# Altium PCB Carrier.PcbDoc (part 1 of 2)
Units mm, origin at the board's own origin, x right, y up, seen from the top; angles counter-clockwise.
Board outline 203.08 x 138.21 mm, 2 copper layers (Top Layer, Bottom Layer), stack 1.58 mm thick; 120 components, 113 nets, 492 pads, 85 vias.
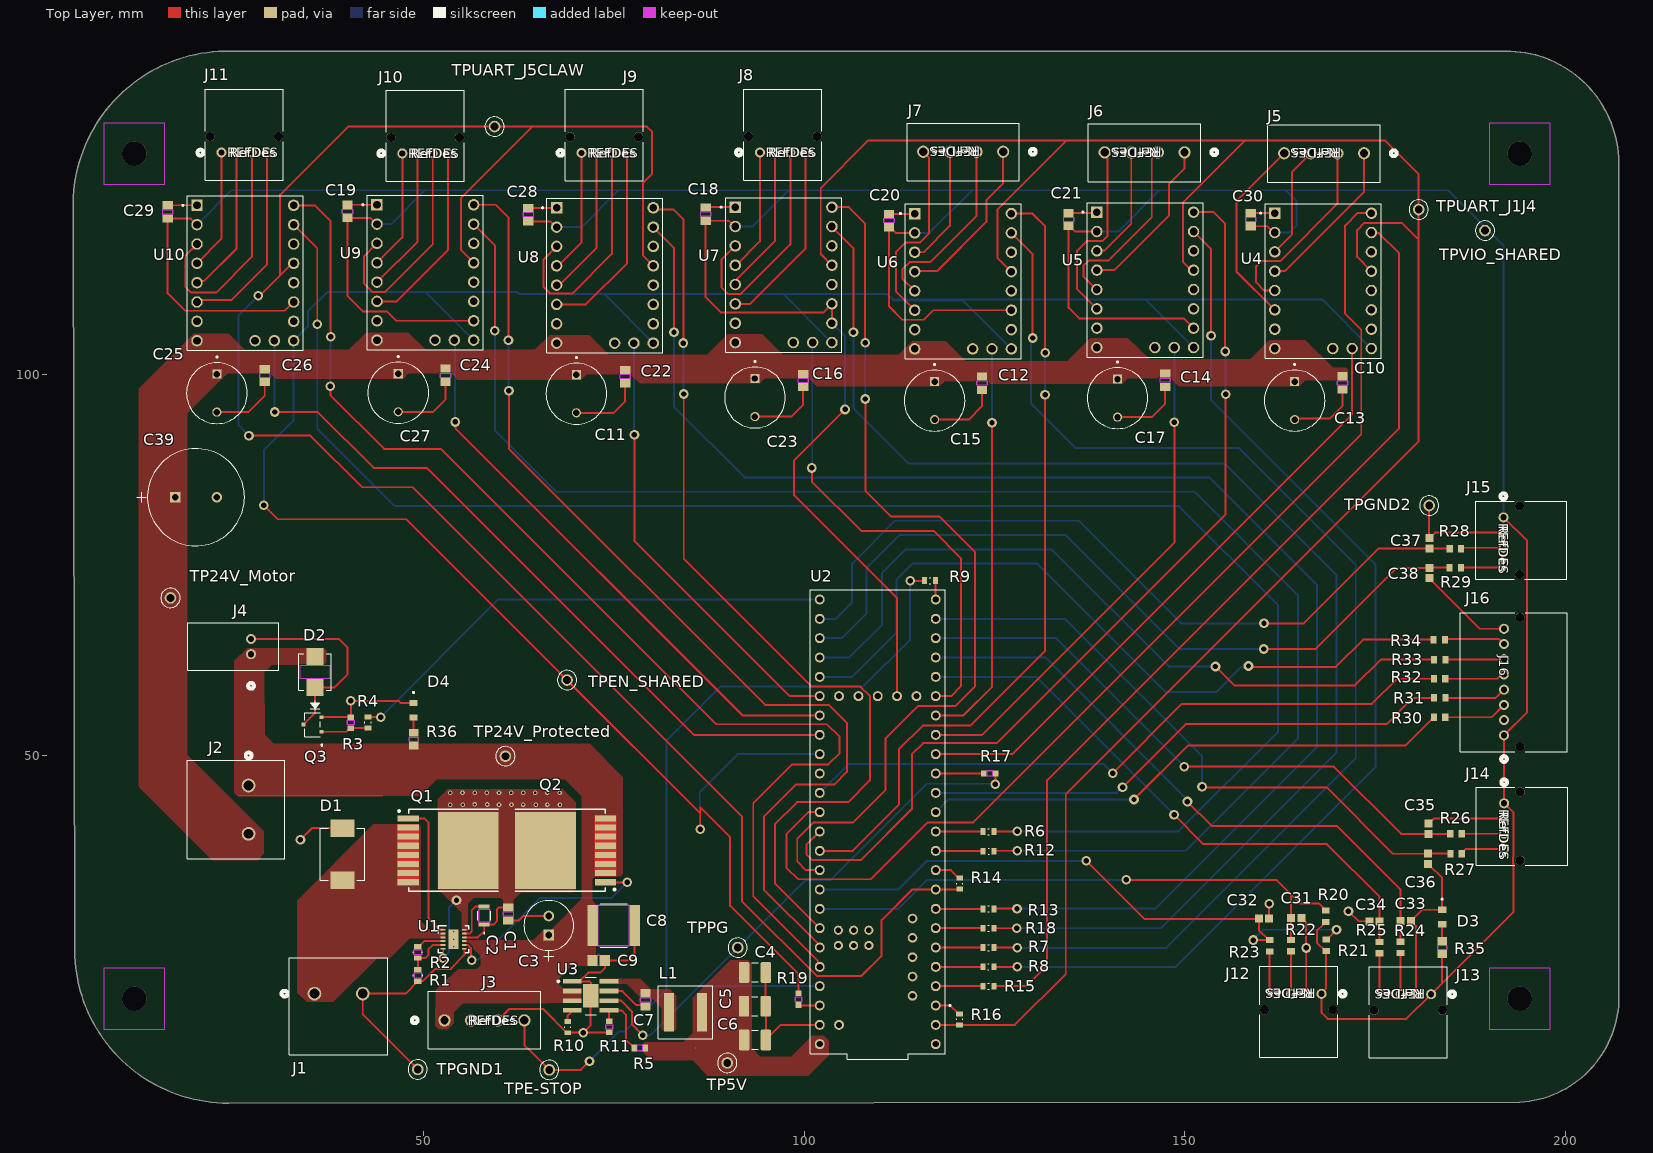
[diagram p0: Top Layer view]
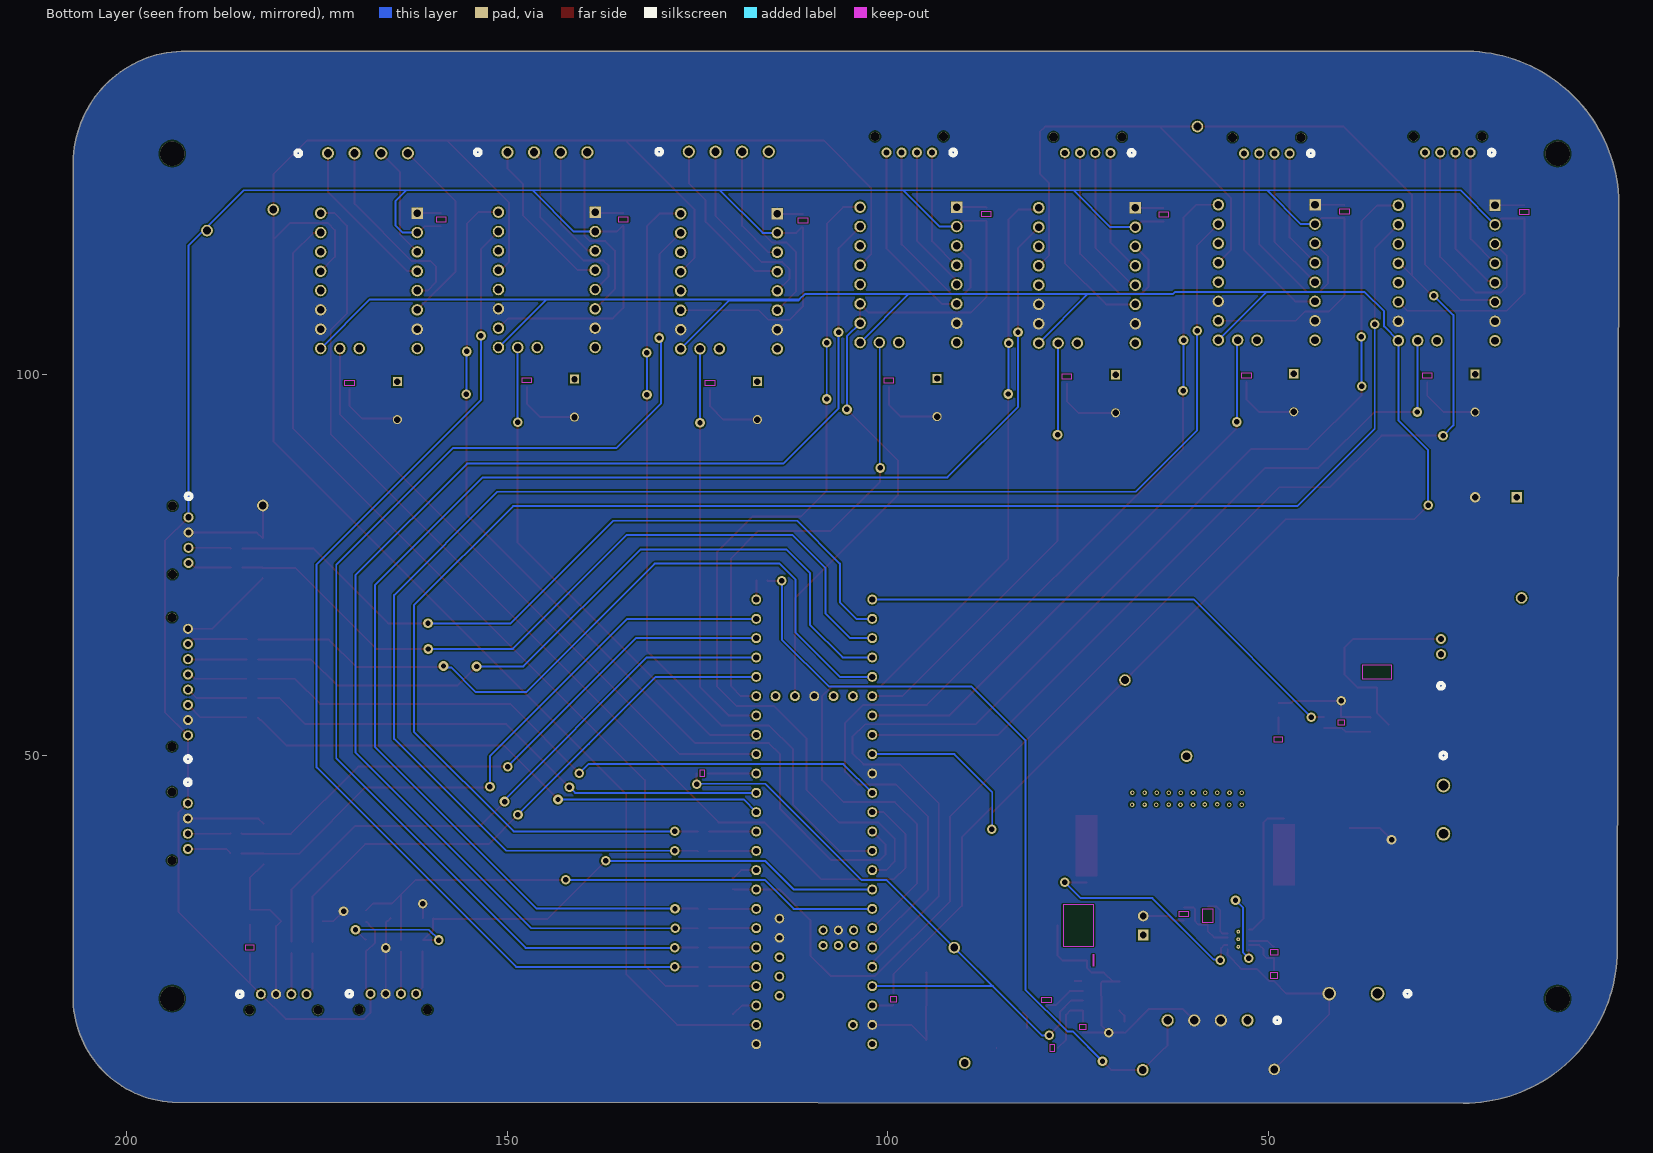
[diagram p1: Bottom Layer view, seen from below]
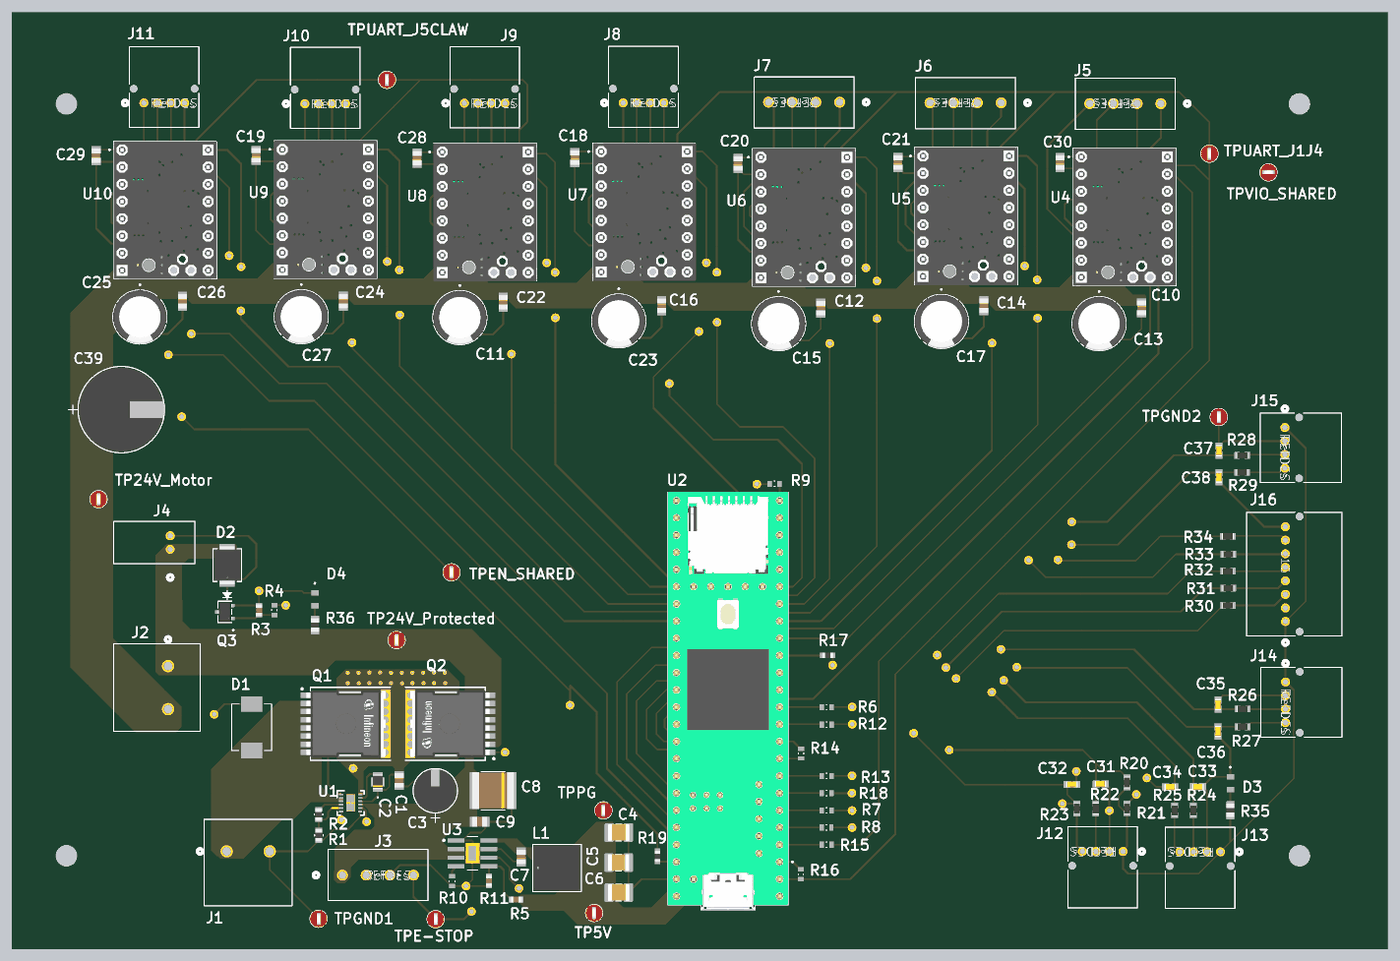
[diagram p3: 3D render of the assembled board from above, using the file's embedded part models]

## Layer stack, top to bottom
Top Solder: solder mask 0.0102, Solder Resist, Dk 3.5
Top Layer: signal copper 0.0356
Dielectric 1: dielectric 1.5086, FR-4, Dk 4.8
Bottom Layer: signal copper 0.0356
Bottom Solder: solder mask 0.0102, Solder Resist, Dk 3.5

## Board outline
4.161,24.355 ccw(c24.314,24.417) 24.377,4.263 24.345,4.276 193.968,4.374 193.999,4.373 ccw(c193.194,18.174) 206.995,18.979 206.995,127.863 ccw(c192.256,127.728) 192.12,142.467 24.593,142.469 ccw(c24.222,122.187) 3.94,122.558

## Design rules (kind name [scope] priority, off if disabled: settings)
Clearance [All] p1: gap=0.2 ignorepadtopadclearanceinfootprint=TRUE
PolygonConnect PolygonConnect_24V_Protected [InNet('24V_Protected') vs InNet('24V_Protected')] p1: connectstyle=Direct reliefconductorwidth=0.254 reliefentries=4 polygonreliefangle="90 Angle" airgapwidth=0.254
PolygonConnect PolygonConnect_24V_MOTOR [InNet('24V_Motor') vs InNet('24V_Motor')] p2: connectstyle=Direct reliefconductorwidth=0.254 reliefentries=4 polygonreliefangle="90 Angle" airgapwidth=0.254
PolygonConnect PolygonConnect_C4_1 [InNet('NetC4_1') vs InNet('NetC4_1')] p3: connectstyle=Direct reliefconductorwidth=0.254 reliefentries=4 polygonreliefangle="90 Angle" airgapwidth=0.254
PolygonConnect PolygonConnect_C7_2 [InNet('NetC7_2') vs InNet('NetC7_2')] p4: connectstyle=Direct reliefconductorwidth=0.254 reliefentries=4 polygonreliefangle="90 Angle" airgapwidth=0.254
PolygonConnect PolygonConnect_C3_1 [InNet('NetC3_1') vs InNet('NetC3_1')] p5: connectstyle=Direct reliefconductorwidth=0.254 reliefentries=4 polygonreliefangle="90 Angle" airgapwidth=0.254
PolygonConnect "PolygonConnect C1_1" [InNet('NetC1_1') vs InNet('NetC1_1')] p6: connectstyle=Direct reliefconductorwidth=0.254 reliefentries=4 polygonreliefangle="90 Angle" airgapwidth=0.254
PolygonConnect "Polygon Connect +24V" [InNet('+24V') vs InNet('+24V')] p7: connectstyle=Direct reliefconductorwidth=0.254 reliefentries=4 polygonreliefangle="90 Angle" airgapwidth=0.254
RoutingVias [All] p1: holewidth=0.711 width=1.27 viastyle="Through Hole" minholewidth=0.711 minwidth=1.27 maxholewidth=0.711 maxwidth=1.27
SolderMaskExpansion [All] p1: expansion=0 istentingtop=FALSE
SupplyNets "Schematic Supply Nets_1" [InNet('GND')] p1: voltage=0.000
SupplyNets "Schematic Supply Nets" [InNet('+24V')] p2: voltage=0.000
Width [All] p1: maxlimit=0.254 minlimit=0.254 preferedwidth=0.254
30 further rules are at their usual default settings.

## Classes and differential pairs
component class Spare_Pins: C31 C32 C33 C34 C35 C36 C37 C38 J12 J14 J15 J16 R20 R21 R22 R23 R24 R25 R26 R27 R28 R29 R30 R31 R32 R33 R34
component class MC: C3 C4 C5 C6 C7 C8 C9 D2 D3 J4 L1 Q3 R3 R4 R5 R6 R7 R8 R9 R10 R11 R12 R13 R14 R15 R16 R17 R18 R19 R35 TP5V TPEN_SHARED TPGND1 TPGND2 TPPG TPVIO_SHARED U2 U3
component class Entry_Protection: C1 C2 C39 D1 D4 J1 J2 J3 Q1 Q2 R1 R2 R36 TP24V_Motor TP24V_Protected TPE-STOP U1
component class Drivers: C10 C11 C12 C13 C14 C15 C16 C17 C18 C19 C20 C21 C22 C23 C24 C25 C26 C27 C28 C29 C30 J5 J6 J7 J8 J9 J10 J11 TPUART_J1J4 TPUART_J5CLAW U4 U5 U6 U7 U8 U9 U10

## Components (designator, comment, footprint, x,y, rotation, side; value= is the part's Value field where it differs from the comment)
C1 "CL21B104KCCWPNC" CAP_CL_21_SAM 61.116,29.114 r270 top
C2 "" CAP_2012_TDK 57.957,28.914 r90 top
C3 "EEUFR1J470" CAP_EEUFC_63X112_PAN 66.444,26.359 r90 top
C4 "CL32B226KAJNNNE" CAPC3225X270N 93.527,21.431 r0 top
C5 "CL32B226KAJNNNE" CAPC3225X270N 93.502,17 r0 top
C6 "CL32B226KAJNNNE" CAPC3225X270N 93.527,12.569 r0 top
C7 "CL21B104KCCWPNC" CAP_CL_21_SAM 79.132,17.823 r90 top
C8 "22201C106MAT2A" CAP_22201C106MAT2A_KYO 74.968,27.61 r180 top
C9 "C0805C154K1RECTU" CAPC220145_140N_KEM 73,23.02 r180 top
C10 "CL21B104KCCWPNC" CAP_CL_21_SAM 170.694,98.889 r270 top
C11 "EEUFR1H101B" CAPPRD500W60D800H1150 70.071,97.457 r270 top value=100µF
C12 "CL21B104KCCWPNC" CAP_CL_21_SAM 123.344,98.85 r270 top
C13 "EEUFR1H101B" CAPPRD500W60D800H1150 164.426,96.562 r270 top value=100µF
C14 "CL21B104KCCWPNC" CAP_CL_21_SAM 147.41,99.235 r270 top
C15 "EEUFR1H101B" CAPPRD500W60D800H1150 117.121,96.557 r270 top value=100µF
C16 "CL21B104KCCWPNC" CAP_CL_21_SAM 99.858,99.202 r270 top
C17 "EEUFR1H101B" CAPPRD500W60D800H1150 141.153,96.887 r270 top value=100µF
C18 "CL21B104KCCWPNC" CAP_CL_21_SAM 87.048,121.062 r90 top
C19 "CL21B104KCCWPNC" CAP_CL_21_SAM 40.002,121.405 r90 top
C20 "CL21B104KCCWPNC" CAP_CL_21_SAM 111.133,120.209 r90 top
C21 "CL21B104KCCWPNC" CAP_CL_21_SAM 134.73,120.353 r90 top
C22 "CL21B104KCCWPNC" CAP_CL_21_SAM 76.475,99.71 r270 top
C23 "EEUFR1H101B" CAPPRD500W60D800H1150 93.525,96.965 r270 top value=100µF
C24 "CL21B104KCCWPNC" CAP_CL_21_SAM 52.874,99.881 r270 top
C25 "EEUFR1H101B" CAPPRD500W60D800H1150 22.84,97.544 r270 top value=100µF
C26 "CL21B104KCCWPNC" CAP_CL_21_SAM 29.128,99.86 r270 top
C27 "EEUFR1H101B" CAPPRD500W60D800H1150 46.662,97.588 r270 top value=100µF
C28 "CL21B104KCCWPNC" CAP_CL_21_SAM 63.756,120.993 r90 top
C29 "CL21B104KCCWPNC" CAP_CL_21_SAM 16.375,121.345 r90 top
C30 "CL21B104KCCWPNC" CAP_CL_21_SAM 158.657,120.341 r90 top
C31 "DNP/placeholder" CAPC1608X90X40ML10T20 164.642,28.588 r0 top value=DNP
C32 "DNP/placeholder" CAPC1608X90X40ML10T20 160.41,28.544 r0 top value=DNP
C33 "DNP/placeholder" CAPC1608X90X40ML10T20 179.013,28.188 r0 top value=DNP
C34 "DNP/placeholder" CAPC1608X90X40ML10T20 174.905,28.161 r180 top value=DNP
C35 "DNP/placeholder" CAPC1608X90X40ML10T20 181.993,40.306 r90 top value=DNP
C36 "DNP/placeholder" CAPC1608X90X40ML10T20 181.973,36.355 r270 top value=DNP
C37 "DNP/placeholder" CAPC1608X90X40ML10T20 182.131,77.809 r90 top value=DNP
C38 "DNP/placeholder" CAPC1608X90X40ML10T20 182.122,73.908 r270 top value=DNP
C39 "EEUFR1H471" "CAP_12.5 X 20_PAN" 17.347,83.867 r0 top
D1 "SMCJ33CA" DIOM6859X262N 39.338,36.972 r270 top
D2 "STPS3H100U" SMB_STM 35.73,60.905 r90 top
D3 "APTD2012LCGCK" LED_APTD2012LCGCK 183.802,28.72 r270 top
D4 "APTD2012LSURCK" LED_APTD2012LSURCK 48.668,55.871 r270 top
J1 "1714955" CONN_1714955_PXC 35.65,18.65 r0 top
J2 "1714955" CONN_1714955_PXC 27,46 r270 top
J3 "1751264" CONN_1751264_PXC 52.734,15.137 r0 top
J4 "S02B-PASK-2" CONN2_S02B-PASK-2_JST 27.316,63.243 r90 top
J5 "1751264" CONN_1751264_PXC 173.542,129.055 r180 top
J6 "1751264" CONN_1751264_PXC 149.961,129.171 r180 top
J7 "1751264" CONN_1751264_PXC 126.13,129.255 r180 top
J8 "S04B-PASK-2" CONN4_S04B-PASK_JST 94.173,129.161 r0 top
J9 "S04B-PASK-2" CONN4_S04B-PASK_JST 70.734,129.107 r0 top
J10 "S04B-PASK-2" CONN4_S04B-PASK_JST 47.196,129.035 r0 top
J11 "S04B-PASK-2" CONN4_S04B-PASK_JST 23.428,129.146 r0 top
J12 "S04B-PASK-2" CONN4_S04B-PASK_JST 167.958,18.631 r180 top
J13 "S04B-PASK-2" CONN4_S04B-PASK_JST 182.352,18.581 r180 top
J14 "S04B-PASK-2" CONN4_S04B-PASK_JST 191.944,43.656 r270 top
J15 "S04B-PASK-2" CONN4_S04B-PASK_JST 191.852,81.226 r270 top
J16 "S08B-PASK-2 (LF)(SN)" CONN_S08B-PASK-2_JST 191.926,52.586 r270 top
L1 "XGL6060-183MEC" IND_XGL6060_COC 84.404,16.205 r0 top
Q1 "IPT017N10NM5LF2ATMA1" IFX-PG-HSOF-8-1-1-V 51.911,37.48 r0 top
Q2 "IPT017N10NM5LF2ATMA1" IFX-PG-HSOF-8-1-1-V 69.945,37.48 r180 top
Q3 "SSM3K2615R,LF" SOT-23F_TOS 35.386,54.007 r90 top
R1 "ERA3AEB5231V" RES_ERA3A_0603_PAN 49.249,21.03 r270 top
R2 "ERA3AEB1133V" RES_ERA3A_0603_PAN 49.224,24.081 r90 top
R3 "ERA-3VEB1003V" RES_ERA3V,3K_PAN 40.428,54.261 r270 top
R4 "ERA3VEB1000V" RES_ERA3VEB1000V 42.692,54.267 r270 top value=100
R5 "ERA-3VEB1003V" RES_ERA3V,3K_PAN 78.381,11.524 r0 top
R6 "ERA3VEB47R0V" RES_ERA3VEB47R0V 124.215,39.936 r180 top
R7 "ERA3VEB47R0V" RES_ERA3VEB47R0V 124.203,24.697 r0 top
R8 "ERA3VEB47R0V" RES_ERA3VEB47R0V 124.179,22.175 r0 top
R9 "ERA3VEB1001V" RES_ERA3VEB1001V 116.53,72.908 r0 top value=1k
R10 "ERJ3EKF6492V" RES_ERJ3EKF6492V 68.929,14.239 r90 top
R11 "ERA-3VEB2492V" RES_ERA3V,3K_PAN 74.381,14.277 r90 top
R12 "ERA3VEB47R0V" RES_ERA3VEB47R0V 124.224,37.351 r180 top
R13 "ERA3VEB47R0V" RES_ERA3VEB47R0V 124.214,29.783 r180 top
R14 "ERA3VEB1001V" RES_ERA3VEB1001V 120.427,33.105 r270 top value=1k
R15 "ERA3VEB47R0V" RES_ERA3VEB47R0V 124.203,19.629 r180 top
R16 "ERA3VEB1001V" RES_ERA3VEB1001V 120.404,15.271 r270 top value=1k
R17 "ERJ-3EKF1002V" RC0603N_PAN 124.369,47.584 r0 top
R18 "ERA3VEB47R0V" RES_ERA3VEB47R0V 124.211,27.241 r0 top
R19 "ERJ-3EKF1002V" RC0603N_PAN 99.248,17.924 r90 top
R20 "Resistor 0R +/- 5% 0603 100 mW" RESC1608X55X25ML10T15 168.522,28.833 r270 top value=0
R21 "Resistor 0R +/- 5% 0603 100 mW" RESC1608X55X25ML10T15 168.558,25.009 r270 top value=0
R22 "Resistor 0R +/- 5% 0603 100 mW" RESC1608X55X25ML10T15 163.937,24.971 r270 top value=0
R23 "Resistor 0R +/- 5% 0603 100 mW" RESC1608X55X25ML10T15 161.138,24.954 r270 top value=0
R24 "Resistor 0R +/- 5% 0603 100 mW" RESC1608X55X25ML10T15 178.333,24.721 r270 top value=0
R25 "Resistor 0R +/- 5% 0603 100 mW" RESC1608X55X25ML10T15 175.564,24.708 r270 top value=0
R26 "Resistor 0R +/- 5% 0603 100 mW" RESC1608X55X25ML10T15 185.62,39.669 r0 top value=0
R27 "Resistor 0R +/- 5% 0603 100 mW" RESC1608X55X25ML10T15 185.626,37.054 r0 top value=0
R28 "Resistor 0R +/- 5% 0603 100 mW" RESC1608X55X25ML10T15 185.547,77.119 r0 top value=0
R29 "Resistor 0R +/- 5% 0603 100 mW" RESC1608X55X25ML10T15 185.533,74.609 r0 top value=0
R30 "Resistor 0R +/- 5% 0603 100 mW" RESC1608X55X25ML10T15 183.456,54.963 r0 top value=0
R31 "Resistor 0R +/- 5% 0603 100 mW" RESC1608X55X25ML10T15 183.489,57.501 r0 top value=0
R32 "Resistor 0R +/- 5% 0603 100 mW" RESC1608X55X25ML10T15 183.456,60.019 r0 top value=0
R33 "Resistor 0R +/- 5% 0603 100 mW" RESC1608X55X25ML10T15 183.497,62.526 r0 top value=0
R34 "Resistor 0R +/- 5% 0603 100 mW" RESC1608X55X25ML10T15 183.415,65.157 r0 top value=0
R35 "ERJ-6ENF6980V" RC0805N_PAN 183.806,24.712 r90 top
R36 "ERJ-6ENF1202V" RC0805N_PAN 48.69,52.068 r270 top
TP5V "5260" KEYSTONE_5260 89.889,9.551 r90 top
TP24V_Motor "5260" KEYSTONE_5260 16.736,70.64 r90 top
TP24V_Protected "5260" KEYSTONE_5260 60.737,49.85 r90 top
TPE-STOP "5260" KEYSTONE_5260 66.497,8.637 r90 top
TPEN_SHARED "5260" KEYSTONE_5260 68.84,59.846 r90 top
TPGND1 "5260" KEYSTONE_5260 49.218,8.698 r90 top
TPGND2 "5260" KEYSTONE_5260 182.095,82.778 r90 top
TPPG "5260" KEYSTONE_5260 91.266,24.699 r90 top
TPUART_J1J4 "5260" KEYSTONE_5260 180.717,121.659 r90 top
TPUART_J5CLAW "5260" KEYSTONE_5260 59.319,132.561 r90 top
TPVIO_SHARED "5260" KEYSTONE_5260 189.433,118.896 r180 top
U1 "LM74800QDRRRQ1" DRR0012E 53.943,25.796 r0 top
U2 "DEV-16771" MODULE_DEV-16771 109.654,41.222 r90 top
U3 "LMR38020SQDDARQ1" DDA0008E-IPC_A 71.946,18.359 r0 top
U4 "TMC2209_SILENTSTEPSTICK" MODULE_TMC2209_SILENTSTEPSTICK 168.16,112.288 r0 top
U5 "TMC2209_SILENTSTEPSTICK" MODULE_TMC2209_SILENTSTEPSTICK 144.793,112.423 r0 top
U6 "TMC2209_SILENTSTEPSTICK" MODULE_TMC2209_SILENTSTEPSTICK 120.857,112.243 r0 top
U7 "TMC2209_SILENTSTEPSTICK" MODULE_TMC2209_SILENTSTEPSTICK 97.286,113.078 r0 top
U8 "TMC2209_SILENTSTEPSTICK" MODULE_TMC2209_SILENTSTEPSTICK 73.815,113.004 r0 top
U9 "TMC2209_SILENTSTEPSTICK" MODULE_TMC2209_SILENTSTEPSTICK 50.217,113.399 r0 top
U10 "TMC2209_SILENTSTEPSTICK" MODULE_TMC2209_SILENTSTEPSTICK 26.574,113.323 r0 top

## Footprints (in the part's own frame and the unit in brackets; to place one, negate y for a bottom-side part, rotate by r counter-clockwise, add the part's x,y. Pads: shape width x height; smd on the part's side, far side on the other; paste and mask are expansions set on the pad)
"CAP_12.5 X 20_PAN" [mil]
  rect 54x54 / inner round 60 / far side rect 54x54 hole 34 paste-99999 mask+0: 1(0,0)
  round 54 / inner round 60 / far side round 54 hole 34 paste-99999 mask+0: 2(216,0)
  silkscreen extent -198,-251 359,251, body extent -138,-246 355,246, height 788
CAP_2012_TDK [mil]
  rect 22x57 smd paste+0 mask+0: 1(-46.5,0) 2(46.5,0)
  Top Layer keep-out region: -33.5,-26.5 -33.5,26.5 33.5,26.5 33.5,-26.5
  Keep-Out Layer region: -33.5,-28.5 -33.5,28.5 33.5,28.5 33.5,-28.5
  silkscreen extent -93,-34 23,34, body extent -44,-29 44,29, height 49
CAP_22201C106MAT2A_KYO [mil]
  rect 55x213 smd paste+0 mask+0: 1(-108.5,0) 2(108.5,0)
  Top Layer keep-out region: -79,-104.5 -79,104.5 79,104.5 79,-104.5
  Keep-Out Layer region: -79,-106.5 -79,106.5 79,106.5 79,-106.5
  silkscreen extent -69,-112 69,112, body extent -122,-106 122,106, height 110
CAP_CL_21_SAM [mil]
  rect 42x53 smd paste+0 mask+0: 1(-34.5,0) 2(34.5,0)
  Top Layer keep-out region: -11.5,-24.5 -11.5,24.5 11.5,24.5 11.5,-24.5
  Keep-Out Layer region: -11.5,-26.5 -11.5,26.5 11.5,26.5 11.5,-26.5
  body extent -41,-26 41,26, height 53
CAP_EEUFC_63X112_PAN [mil]
  rect 55x55 hole 35 paste-99999 mask+0: 1(0,0)
  round 55 hole 35 paste-99999 mask+0: 2(98,0)
  silkscreen extent -135,-129 178,129, body extent -75,-124 174,124, height 481
CAPC1608X90X40ML10T20 [mm] "Chip Capacitor, 2-Leads, Body 1.70x0.90mm, IPC Low Density"
  rect 1.05x1.05 smd: 1(-0.675,0) 2(0.675,0)
  body extent -0.85,-0.45 0.85,0.45, height 0.9
CAPC3225X270N [mm]
  rrect25% 1.37x2.72 smd: 1(-1.421,0) 2(1.421,0)
  silkscreen extent -0.42,-1.25 0.42,1.25, body extent -1.6,-1.25 1.6,1.25, height 2.7
CAPC220145_140N_KEM [mm]
  rect 1.306x1.45 smd paste+0 mask+0: 1(-0.803,0) 2(0.803,0)
  Top Layer keep-out region: -0.099,-0.674 -0.099,0.674 0.099,0.674 0.099,-0.674
  Keep-Out Layer region: -0.099,-0.725 -0.099,0.725 0.099,0.725 0.099,-0.725
  body extent -1.1,-0.72 1.1,0.72, height 1.4
CAPPRD500W60D800H1150 [mm]
  round 1.2 hole 0.85: N(2.5,0)
  rect 1.2x1.2 hole 0.85: P(-2.5,0)
  silkscreen extent -4.85,-4 4,4, body extent -4,-4 4,4, height 11.5
CONN2_S02B-PASK-2_JST [mil]
  round 52 hole 32 paste-99999 mask+0: 1(0,0) 2(78.74,0)
  silkscreen extent -179,-143 162,328
CONN4_S04B-PASK_JST [mil]
  round 52 / inner round 60 / far side round 52 hole 32 paste-99999 mask+0: 1(0,0) 2(78.74,0) 3(157.48,0) 4(236.22,0)
  round 47 / inner round 60 / far side round 47 hole 47 unplated paste-99999 mask+0: 5(-59.06,82.68) 6(295.28,82.68)
  silkscreen extent -124,-143 320,328
CONN_1714955_PXC [mil]
  round 71 / inner round 60 / far side round 71 hole 51 paste-99999 mask+0: 1(0,0) 2(250,0)
  silkscreen extent -170,-316 380,186
CONN_1751264_PXC [mil]
  round 63 / inner round 60 / far side round 63 hole 43 paste-99999 mask+0: 1(0,0) 2(137.8,0) 3(275.59,0) 4(413.39,0)
  silkscreen extent -169,-147 497,151
CONN_S08B-PASK-2_JST [mil]
  round 52 hole 32 paste-99999 mask+0: 1(0,0) 2(-78.74,0) 3(-157.48,0) 4(-236.22,0) 5(-314.96,0) 6(-393.7,0) 7(-472.44,0) 8(-551.18,0)
  round 47 hole 47 unplated paste-99999 mask+0: 9(-610.24,82.68) 10(59.06,82.68)
  silkscreen extent -635,-225 138,328
DDA0008E-IPC_A [mm]
  rect 2.474x0.622 smd paste+0 mask+0: 1(-2.416,1.905) 2(-2.416,0.635) 3(-2.416,-0.635) 4(-2.416,-1.905) 5(2.416,-1.905) 6(2.416,-0.635) 7(2.416,0.635) 8(2.416,1.905)
  rect 2.025x3.1 smd paste-1.537 mask+0: 9(0,0)
  silkscreen extent -4.37,-2.45 0.75,2.45
DIOM6859X262N [mm]
  rect 2.29x3.12 smd: 1(-3.43,0) 2(3.43,0)
  silkscreen extent -3.43,-2.95 3.43,2.95
DRR0012E [mm]
  rect 0.62x0.25 smd paste+0 mask+0.051: 1(-1.39,1.25) 2(-1.39,0.75) 3(-1.39,0.25) 4(-1.39,-0.25) 5(-1.39,-0.75) 6(-1.39,-1.25) 7(1.39,-1.25) 8(1.39,-0.75) 9(1.39,-0.25) 10(1.39,0.25) 11(1.39,0.75) 12(1.39,1.25)
  rect 1.3x2.5 smd paste-1.237 mask+0.051: 13(0,0)
  round 0.5 hole 0.203 paste-2539.97 mask+0.051: 14(0,-1) 15(0.025,0) 16(0,1)
  silkscreen extent -2,-1.8 2,1.8
IFX-PG-HSOF-8-1-1-V [mm] "PG-HSOF-8-1, SMD, 1.20 mm pitch, 9 pin, 10.375 mm L X 9.90 mm W X 2.40 mm H body"
  rect 2.8x0.8 smd paste-0.4 mask+0: 1(-3.95,4.2) 2(-3.95,3) 3(-3.95,1.8) 4(-3.95,0.6) 5(-3.95,-0.6) 6(-3.95,-1.8) 7(-3.95,-3) 8(-3.95,-4.2)
  rect 8x10.1 smd paste-4 mask-4: 9(3.95,0)
  Top Layer region: -5.35,-4.6 -5.35,3.4 -2.55,3.4 -2.55,-4.6
  silkscreen extent -5.26,-5.4 7.9,5.4, body extent -4.5,-4.95 7.18,4.95, height 2.31
IND_XGL6060_COC [mil]
  rect 51x197 smd paste+0 mask+0: 1(-85.5,0) 2(85.5,0)
  silkscreen extent -141,-137 141,137, body extent -136,-132 136,132, height 240
KEYSTONE_5260 [mm]
  round 1.53 hole 1.02: 1(0,0)
  silkscreen extent -1.27,-1.27 1.27,1.27, body extent -1.27,-1.26 1.27,1.27, height 4.57
LED_APTD2012LCGCK [mm]
  rect 0.8x1.1 smd: 1(-0.95,0) 2(0.95,0)
  silkscreen extent -2.45,-0.1 -2.25,0.1
LED_APTD2012LSURCK [mm]
  rect 0.8x1.1 smd: 1(-0.95,0) 2(0.95,0)
  silkscreen extent -2.45,-0.1 -2.25,0.1
MODULE_DEV-16771 [mm]
  round 1.308 hole 0.8: 0(-26.67,-7.62) 1(-24.13,-7.62) 2(-21.59,-7.62) 3(-19.05,-7.62) 3.3V_1(6.35,-7.62) 3.3V_2(-24.13,7.62) 3.3V_3(16.51,-2.54) 4(-16.51,-7.62) 5(-13.97,-7.62) 6(-11.43,-7.62) 7(-8.89,-7.62) 8(-6.35,-7.62) 9(-3.81,-7.62) 10(-1.27,-7.62) 11(1.27,-7.62) 12(3.81,-7.62) 13(3.81,7.62) 14(1.27,7.62) 15(-1.27,7.62) 16(-3.81,7.62) 17(-6.35,7.62) 18(-8.89,7.62) 19(-11.43,7.62) 20(-13.97,7.62) 21(-16.51,7.62) 22(-19.05,7.62) 23(-21.59,7.62) 24(8.89,-7.62) 25(11.43,-7.62) 26(13.97,-7.62) 27(16.51,-7.62) 28(19.05,-7.62) 29(21.59,-7.62) 30(24.13,-7.62) 31(26.67,-7.62) 32(29.21,-7.62) 33(29.21,7.62) 34(26.67,7.62) 35(24.13,7.62) 36(21.59,7.62) 37(19.05,7.62) 38(16.51,7.62) 39(13.97,7.62) 40(11.43,7.62) 41(8.89,7.62) GND1(-29.21,-7.62) GND2(6.35,7.62) GND3(-26.67,7.62) GND4(16.51,0) ON/OFF(16.51,5.08) PROGRAM(16.51,2.54) VBAT(16.51,-5.08) VIN(-29.21,7.62) VUSB(-26.67,5.08)
  round 1.258 hole 0.75: 5V(-22.86,-4.57) D+(-17.78,-4.57) D-(-20.32,-4.57) USB_GND1(-15.24,-4.57) USB_GND2(-12.7,-4.57)
  round 1.208 hole 0.7: GND5(-14.24,3.17) LED(-16.24,3.17) R+(-16.24,5.17) R-(-14.24,5.17) T+(-14.24,1.17) T-(-16.24,1.17)
  silkscreen extent -31.18,-9.6 30.48,8.89, body extent -31.18,-8.89 30.48,8.89, height 7.15
MODULE_TMC2209_SILENTSTEPSTICK [mm]
  rect 1.508x1.508 / inner round 1.508 / far side rect 1.508x1.508 hole 1: 1(-6.35,8.89)
  round 1.508 hole 1: 2(-6.35,6.35) 3(-6.35,3.81) 4(-6.35,1.27) 5(-6.35,-1.27) 6(-6.35,-3.81) 7(-6.35,-6.35) 8(-6.35,-8.89) 9(6.35,8.89) 10(6.35,6.35) 11(6.35,3.81) 12(6.35,1.27) 13(6.35,-1.27) 14(6.35,-3.81) 15(6.35,-6.35) 16(6.35,-8.89) 17(1.27,-8.89) 18(3.81,-8.89)
  silkscreen extent -8.3,-10.16 7.62,10.16, body extent -7.62,-10.16 7.62,10.16, height 5.5
RC0603N_PAN [mm]
  rect 0.75x0.8 smd paste+0 mask+0: 1(-0.775,0) 2(0.775,0)
  Top Layer keep-out region: -0.349,-0.349 -0.349,0.349 0.349,0.349 0.349,-0.349
  Keep-Out Layer region: -0.349,-0.4 -0.349,0.4 0.349,0.4 0.349,-0.4
  body extent -0.8,-0.4 0.8,0.4, height 0.71
RC0805N_PAN [mm]
  rect 1.006x1.2 smd paste+0 mask+0: 1(-0.853,0) 2(0.853,0)
  Top Layer keep-out region: -0.299,-0.549 -0.299,0.549 0.299,0.549 0.299,-0.549
  Keep-Out Layer region: -0.299,-0.6 -0.299,0.6 0.299,0.6 0.299,-0.6
  body extent -1,-0.6 1,0.6, height 0.71
RES_ERA3A_0603_PAN [mil]
  rect 28x39 smd paste+0 mask+0: 1(-29.5,0) 2(29.5,0)
  Top Layer keep-out region: -13.5,-17.5 -13.5,17.5 13.5,17.5 13.5,-17.5
  Keep-Out Layer region: -13.5,-19.5 -13.5,19.5 13.5,19.5 13.5,-19.5
  silkscreen extent -3,-24 3,24, body extent -36,-19 36,19, height 22
RES_ERA3V,3K_PAN [mil]
  rect 28x35 smd paste+0 mask+0: 1(-28.45,0) 2(28.45,0)
  Top Layer keep-out region: -12.45,-15.5 -12.45,15.5 12.45,15.5 12.45,-15.5
  Keep-Out Layer region: -12.45,-17.5 -12.45,17.5 12.45,17.5 12.45,-17.5
  body extent -34,-17 34,17, height 22
RES_ERA3VEB47R0V [mm]
  rect 0.65x0.9 smd: 1(-0.725,0) 2(0.725,0)
  silkscreen extent -0.08,-0.4 0.08,0.4
RES_ERA3VEB1000V [mm]
  rect 0.65x0.9 smd: 1(-0.725,0) 2(0.725,0)
  silkscreen extent -0.08,-0.4 0.08,0.4
RES_ERA3VEB1001V [mm]
  rect 0.65x0.9 smd: 1(-0.725,0) 2(0.725,0)
  silkscreen extent -0.08,-0.4 0.08,0.4
RES_ERJ3EKF6492V [mm]
  rect 0.65x0.9 smd: 1(-0.725,0) 2(0.725,0)
  silkscreen extent -0.08,-0.4 0.08,0.4
RESC1608X55X25ML10T15 [mm] "Chip Resistor, 2-Leads, Body 1.70x0.90mm, IPC Low Density"
  rect 0.8x1 smd: 1(-0.75,0) 2(0.75,0)
  body extent -0.85,-0.45 0.85,0.45, height 0.55
SMB_STM [mil]
  rect 87x89 smd paste+0 mask+0: 1(-80.5,0) 2(80.5,0)
  Top Layer keep-out region: -35,-76 -35,76 35,76 35,-76
  Keep-Out Layer region: -35,-76 -35,76 35,76 35,-76
  silkscreen extent -199,-83 96,83, body extent -110,-78 110,78, height 104
SOT-23F_TOS [mil]
  rect 20x20 smd paste+0 mask+0: 1(-37.4,-47) 2(37.4,-47) 3(0,47)
  silkscreen extent -112,-54 62,41, body extent -57,-43 57,43, height 37

## Part data
C1: "No Description Available", Capacitor=100n, Manufacturer_Name=Samsung, Copyright="Copyright (C) 2026 Ultra Librarian. All rights reserved.", Manufacturer_Part_Number=CL21B104KCCWPNC
C2: library part C2012X7R1H474K125AB, "No Description Available", Capacitance=470n, Manufacturer_Name=TDK, Copyright="Copyright (C) 2026 Ultra Librarian. All rights reserved.", Manufacturer_Part_Number=C2012X7R1H474K125AB
C3: "Description", Capacitance=47u, Manufacturer_Name=Panasonic, Copyright="Copyright (C) 2026 Ultra Librarian. All rights reserved.", Manufacturer_Part_Number=EEUFR1J470
C4 C5 C6: library part CMP-001-00083-1, "22 ÂµF Â±10% 25V Ceramic Capacitor X7R 1210 (3225 Metric)", Capacitance=22µF, Case/Package="SMD-2 Samsung", Check_prices=https://www.snapeda.com/parts/CL32B226KAJNNNE/Samsung/view-part/?ref=eda, Component Type=Standard, Design Item ID=CL32B226KAJNNNE, MF="Samsung Electro-Mechanics", MP=CL32B226KAJNNNE, Pins=2, SnapEDA_Link=https://www.snapeda.com/parts/CL32B226KAJNNNE/Samsung/view-part/?ref=snap, Source=CL32B226KAJNNNE.SchLib
C7 C10 C12 C14 C16 C18 C19 C20 C21 C22 C24 C26 C28 C29 C30: "No Description Available", Capacitance=100n, Manufacturer_Name=Samsung, Copyright="Copyright (C) 2026 Ultra Librarian. All rights reserved.", Manufacturer_Part_Number=CL21B104KCCWPNC
C8: "Description", Capacitance=10u, Manufacturer_Name="KYOCERA AVX", Copyright="Copyright (C) 2026 Ultra Librarian. All rights reserved.", Manufacturer_Part_Number=22201C106MAT2A
C9: "ESD SMD Comm X7R, Ceramic, 0.15 uF, 10%, 100 VDC, X7R, SMD, MLCC, Temperature Stable, Electro Static Discharge, Class II, 0805", Capacitance=150n, Manufacturer_Name=Kemet, Copyright="Copyright (C) 2026 Ultra Librarian. All rights reserved.", Manufacturer_Part_Number=C0805C154K1RECTU
C11 C13 C15 C17 C23 C25 C27: library part CMP-001-00084-1, "Cap Aluminum 100uF 50V 20% (8 X 11.5mm) Radial 5mm 870mA 6000 hr 105C Ammo Pack", Case/Package="RADIAL-2 Panasonic", Availability="In Stock", Check_prices=https://www.snapeda.com/parts/EEU-FR1H101B/Panasonic%20Electronic%20Components/view-part/1356823/?ref=eda, Component Type=Standard, Design Item ID=EEUFR1H101B, MF="Panasonic Electronic", MP=EEU-FR1H101B, Pins=2, Price=None, Purchase-URL=https://pricing.snapeda.com/search/part/EEU-FR1H101B/?ref=eda, SnapEDA_Link=https://www.snapeda.com/parts/EEU-FR1H101B/Panasonic%20Electronic%20Components/view-part/1356823/?ref=snap, Source=EEUFR1H101B.SchLib
C31 C32 C33 C34 C35 C36 C37 C38: library part CMP-001-00014-6, "0603 (1608 Metric)", Capacitor Type=Ceramic, Case/Package=0603, Max Operating Temperature=125°C, Min Operating Temperature=-55°C, Tolerance=5%, Voltage Rating=50V, Mounting Technology=SM, Pins=2, RoHS Compliant=True
C39 R1: "Description", Manufacturer_Name=Panasonic
  C39: Copyright="Copyright (C) 2025 Ultra Librarian. All rights reserved.", Manufacturer_Part_Number=EEUFR1H471
  R1: Copyright="Copyright (C) 2026 Ultra Librarian. All rights reserved.", Manufacturer_Part_Number=ERA3AEB5231V
D1: library part CMP-004-00031-1, Case/Package=None, Availability=Unavailable, Component Type=Standard, Design Item ID=SMCJ33CA, MP=SMCJ33CA, Pins=2, Price=None, Source=SMCJ33CA.SchLib
D2: "100 V, 3 A Schottky rectifier", Manufacturer_Name=STMicroelectronics, Copyright="Copyright (C) 2025 Ultra Librarian. All rights reserved.", Manufacturer_Part_Number=STPS3H100U
D3: library part CMP-003-000000-1, "Green 570nm LED Indication - Discrete 1.9V 0805 (2012 Metric)", Package="0805 Kingbright", Check_prices=https://www.snapeda.com/parts/APTD2012LCGCK/Kingbright/view-part/?ref=eda, Component Type=Standard, Design Item ID=APTD2012LCGCK, MF=Kingbright, MP=APTD2012LCGCK, Pin Count=2, SnapEDA_Link=https://www.snapeda.com/parts/APTD2012LCGCK/Kingbright/view-part/?ref=snap, Source=APTD2012LCGCK.SchLib
D4: library part CMP-005-000000-1, "Red 630nm LED Indication - Discrete 1.75V 0805 (2012 Metric)", Package="0805 Kingbright", Check_prices=https://www.snapeda.com/parts/APTD2012LSURCK/Kingbright/view-part/?ref=eda, Component Type=Standard, Design Item ID=APTD2012LSURCK, MF=Kingbright, MP=APTD2012LSURCK, Pin Count=2, SnapEDA_Link=https://www.snapeda.com/parts/APTD2012LSURCK/Kingbright/view-part/?ref=snap, Source=APTD2012LSURCK.SchLib
J1 J2: "PCB terminal block, nominal current: 32 A, rated voltage (III/2): 630 V, nominal cross section: 4 mmÂ², number of potentials: 2, number of rows: 1, number of positions per row: 2, product range: MKDS 5, pitch: 6.35 mm, connection method: Screw connection with tension sleeve, screw head form: L Slotted, mounting: Wave soldering, conductor/PCB connection direction: 0 Â°, color: green, Pin layout: Linear pinning, Solder pin [P]: 5.1 mm, number of solder pins per potential: 1, type of packaging: packed in cardboard. The article can be aligned to create different nos. of positions!", Manufacturer_Name="Phoenix Contact", Copyright="Copyright (C) 2025 Ultra Librarian. All rights reserved.", Manufacturer_Part_Number=1714955, RefDes=RefDes, Type=Type
J3 J5 J6 J7: "PCB terminal block, nominal current: 17.5 A, rated voltage (III/2): 200 V, nominal cross section: 1.5 mmÂ², number of potentials: 4, number of rows: 1, number of positions per row: 4, product range: MKDS 1, pitch: 3.5 mm, connection method: Screw connection with tension sleeve, screw head form: L Slotted, mounting: Wave soldering, conductor/PCB connection direction: 0 Â°, color: green, Pin layout: Linear pinning, Solder pin [P]: 3.5 mm, number of solder pins per potential: 1, type of packaging: packed in cardboard. Suitable for CAT5", Manufacturer_Name="Phoenix Contact", Copyright="Copyright (C) 2025 Ultra Librarian. All rights reserved.", Manufacturer_Part_Number=1751264, RefDes=RefDes, Type=Type
J4 J8 J9 J10 J11 J12 J13 J14 J15: "Description", Manufacturer_Name=JST, RefDes=RefDes
  J4: Copyright="Copyright (C) 2026 Ultra Librarian. All rights reserved.", Manufacturer_Part_Number=S02B-PASK-2, Type=Type
  J8 J9 J10 J11 J12 J13 J14 J15: Copyright="Copyright (C) 2025 Ultra Librarian. All rights reserved.", Manufacturer_Part_Number=S04B-PASK-2, Type="Headers, Male Pins"
J16: library part "S08B-PASK-2 LFSN", "Description", Manufacturer_Name=JST, Copyright="Copyright (C) 2026 Ultra Librarian. All rights reserved.", Manufacturer_Part_Number="S08B-PASK-2 (LF)(SN)", RefDes=RefDes, Type=Type
L1: "Description", Inductance=18u, Manufacturer_Name=Coilcraft, Copyright="Copyright (C) 2026 Ultra Librarian. All rights reserved.", Manufacturer_Part_Number=XGL6060-183MEC
Q1 Q2: library part IPT017N10NM5LF2, "Insulated-Gate Field-Effect Transistor (IGFET), N-Channel, Enhancement, Body Diode, Pin 1 Gate, 2-8 Source, 9 Drain, 9 Pins", Manufacturer="Infineon Technologies", Manufacturer Order Number=IPT017N10NM5LF2, PackageReference=PG-HSOF-8-1
Q3: "N-ch MOSFET, 60 V, 2.0 A, 0.3 Î©@10V, SOT-23F", Manufacturer_Name="Toshiba Electronic Devices & Storage Corp.", Copyright="Copyright (C) 2026 Ultra Librarian. All rights reserved.", Datasheet=https://toshiba.semicon-storage.com/info/docget.jsp?did=15659&prodName=SSM3K2615R, Manufacturer_Part_Number=SSM3K2615R,LF, RefDes=Refdes, Type=Type
R2: "No Description Available", Manufacturer_Name=Panasonic, Resistance=113k, Copyright="Copyright (C) 2026 Ultra Librarian. All rights reserved.", Manufacturer_Part_Number=ERA3AEB1133V
R3 R5: "No Description Available", Manufacturer_Name=Panasonic, Resistance=100k, Copyright="Copyright (C) 2026 Ultra Librarian. All rights reserved.", Manufacturer_Part_Number=ERA-3VEB1003V
R4: library part CMP-009-00180-1, Case/Package=None, Availability=Unavailable, Component Type=Standard, Design Item ID=ERA3VEB1000V, MP=ERA3VEB1000V, Pins=2, Price=None, Source=ERA3VEB1000V.SchLib
R6 R7 R8 R12 R13 R15 R18: library part CMP-009-00179-1, Case/Package=None, Resistance=47, Availability=Unavailable, Component Type=Standard, Design Item ID=ERA3VEB47R0V, MP=ERA3VEB47R0V, Pins=2, Price=None, Source=ERA3VEB47R0V.SchLib
R9 R14 R16: library part CMP-009-00178-1, Case/Package=None, Availability=Unavailable, Component Type=Standard, Design Item ID=ERA3VEB1001V, MP=ERA3VEB1001V, Pins=2, Price=None, Source=ERA3VEB1001V.SchLib
R10: library part CMP-009-00177-1, Case/Package=None, Resistance=64.9k, Availability=Unavailable, Component Type=Standard, Design Item ID=ERJ3EKF6492V, MF="{'manufacturer': u'Panasonic Electronic Components'}", MP=ERJ3EKF6492V, Pins=2, Price=None, Source=ERJ3EKF6492V.SchLib
R11: "No Description Available", Manufacturer_Name=Panasonic, Resistance=24.9k, Copyright="Copyright (C) 2026 Ultra Librarian. All rights reserved.", Manufacturer_Part_Number=ERA-3VEB2492V
R17 R19: "SMD-Resistor, 0603, 0,063W, 1%, 100ppm", Manufacturer_Name=Panasonic, Resistance=10k, Copyright="Copyright (C) 2025 Ultra Librarian. All rights reserved.", Manufacturer_Part_Number=ERJ-3EKF1002V
R20 R21 R22 R23 R24 R25 R26 R27 R28 R29 R30 R31 R32 R33 R34: library part CMP-009-00006-5, "Chip Resistor, 0 Ohm, 0.1 W, -55 to 155 degC, 0603 (1608 Metric)", Case/Package=0603, Max Operating Temperature=155°C, Min Operating Temperature=-55°C, Power=100mW, Tolerance=5%, Voltage Rating=50V, Mounting Technology=SM, Pins=2, RoHS Compliant=True
R35: "No Description Available", Manufacturer_Name=Panasonic, Resistance=698, Copyright="Copyright (C) 2026 Ultra Librarian. All rights reserved.", Manufacturer_Part_Number=ERJ-6ENF6980V
R36: "Description", Manufacturer_Name=Panasonic, Resistance=12k, Copyright="Copyright (C) 2026 Ultra Librarian. All rights reserved.", Manufacturer_Part_Number=ERJ-6ENF1202V
TP5V TP24V_Motor TP24V_Protected TPE-STOP TPEN_SHARED TPGND1 TPGND2 TPPG TPUART_J1J4 TPUART_J5CLAW TPVIO_SHARED: library part CMP-007-000000-1, "TEST POINT (RED) - MINIATURE", Package=None, Check_prices=https://www.snapeda.com/parts/5260/Keystone/view-part/?ref=eda, Component Type=Standard, Design Item ID=5260, MF="Keystone Electronics", MP=5260, Pin Count=1, SnapEDA_Link=https://www.snapeda.com/parts/5260/Keystone/view-part/?ref=snap, Source=5260.SchLib
U1: "3-V to 65-V, automotive ideal diode controller driving back to back NFETs 12-WSON -40 to 125", Manufacturer_Name="Texas Instruments", Copyright="Copyright (C) 2026 Ultra Librarian. All rights reserved.", Manufacturer_Part_Number=LM74800QDRRRQ1, RefDes=RefDes, Type=TYPE
U2: library part CMP-003-000000-1, "RT1062 Teensy 4.1 series ARM® Cortex®-M7 MPU Embedded Evaluation Board", Package=None, Check_prices=https://www.snapeda.com/parts/DEV-16771/SparkFun+Electronics/view-part/?ref=eda, Component Type=Standard, Design Item ID=DEV-16771, MF="SparkFun Electronics", MP=DEV-16771, Pin Count=65, SnapEDA_Link=https://www.snapeda.com/parts/DEV-16771/SparkFun+Electronics/view-part/?ref=snap, Source=DEV-16771.SchLib
U3: "Automotive SIMPLE SWITCHERÂ® power converter 4.2-V to 80-V, 2-A, synchronous buck converter 8-SO PowerPAD -40 to 150", Manufacturer_Name="Texas Instruments", Copyright="Copyright (C) 2025 Ultra Librarian. All rights reserved.", Manufacturer_Part_Number=LMR38020SQDDARQ1, RefDes=>Name, Type=>Value
U4 U5 U6 U7 U8 U9 U10: library part CMP-005-000000-1, "TMC2209 Motor Controller/Driver Power Management Evaluation Board", Package=None, Check_prices=https://www.snapeda.com/parts/TMC2209%20SILENTSTEPSTICK/Trinamic/view-part/?ref=eda, Component Type=Standard, Design Item ID=TMC2209_SILENTSTEPSTICK, MF="Trinamic Motion Control GmbH", MP="TMC2209 SILENTSTEPSTICK", Pin Count=18, SnapEDA_Link=https://www.snapeda.com/parts/TMC2209%20SILENTSTEPSTICK/Trinamic/view-part/?ref=snap, Source=TMC2209_SILENTSTEPSTICK.SchLib

## Free pads (board coordinates)
  round 3.2 hole 3.2 unplated: 1(12,18) 1(12,129) 1(194,18) 1(194,129)

## Via types
v1: diameter 1.27, hole 0.711, Top Layer to Bottom Layer, 65 vias
v2: diameter 0.6, hole 0.3, Top Layer to Bottom Layer, 20 vias

## Nets (pads, with @x,y where several pads share a name; then routed paths per layer and width w, separated by ;. In a path a pad name is that pad's centre, name@x,y a point inside that pad or via, vN(x,y) a via of type N, cw(c..) or ccw(c..) an arc to the next point about the centre after c; other vN are vias at no path point)
24V_Motor: C10.1 C11.P C12.1 C13.P C14.1 C15.P C16.1 C17.P C22.1 C23.P C24.1 C25.P C26.1 C27.P C39.1 J2.2 TP24V_Motor.1 U4.8 U5.8 U6.8 U7.8 U8.8 U9.8 U10.8
24V_Protected: C3.1 C8.2 C9.2 D2.2 J2.1 J3.1 J4.1 Q2.2 Q2.3 Q2.4 Q2.5 Q2.6 Q2.7 Q2.8 R36.2 TP24V_Protected.1 U1.9 U3.2 U3.3
+24V: D1.2 J1.1 Q1.2 Q1.3 Q1.4 Q1.5 Q1.6 Q1.7 Q1.8 U1.2 U1.3
EN_SHARED: R19.2 TPEN_SHARED.1 U2.41 U4.16 U5.16 U6.16 U7.16 U8.16 U9.16 U10.16 | length 355.6
  Top Layer w0.254: v1(29,82.831) 30.86,80.97 47.715,80.97 66.572,62.113 69.028,59.657 86.338,42.347 ; v1(86.331,40.229) 86.338,40.237 86.338,42.347 ; 86.505,42.953 86.338,43.12 86.338,42.347 ; 86.523,42.935 90.265,39.193 90.265,30.186 99.248,21.203 R19.2@99.248,18.699
  Bottom Layer w0.254: v1(29,82.831) 29,90.03 32.924,93.954 U10.16@32.924,104.433 34.804,106.314 34.804,108.278 37.353,110.826 50.25,110.826 ; U9.16@56.567,104.509 50.25,110.826 ; U8.16@80.165,104.114 73.693,110.585 ; v1(86.331,40.229) 86.268,40.293 86.268,45.131 91.249,50.112 U2.41@102.034,50.112 ; U7.16@103.636,104.188 97.239,110.585 ; U6.16@127.207,103.353 120.871,109.688 111.757,109.688 111.598,109.848 ; U5.16@151.143,103.533 144.828,109.848 ; U4.16@174.51,103.398 168.06,109.848 144.828,109.848 ; 50.25,110.826 62.271,110.826 62.513,110.585 73.693,110.585 ; 73.693,110.585 97.239,110.585 ; 97.239,110.585 110.861,110.585 111.598,109.848 ; 111.598,109.848 144.828,109.848
GND: C1.2 C3.2 C4.2 C5.2 C6.2 C8.1 C9.1 C10.2 C11.N C12.2 C13.N C14.2 C15.N C16.2 C17.N C18.2 C19.2 C20.2 C21.2 C22.2 C23.N C24.2 C25.N C26.2 C27.N C28.2 C29.2 C30.2 C31.2 C32.2 C33.2 C34.2 C35.2 C36.2 C37.2 C38.2 C39.2 D1.1 D3.1 D4.1 J1.2 J3.2 J3.3 J12.2 J13.2 J14.2 J15.2 J16.2 J16.8 Q3.2 R1.2 R3.1 R10.1 R11.1 TPGND1.1 TPGND2.1 U1.7 U2.GND1 U2.GND2 U2.GND3 U2.GND4 U2.GND5 U2.USB_GND1 U2.USB_GND2 U3.1 U3.9 U4.1 U4.7 U4.14 U4.15 U5.1 U5.7 U5.14 U6.1 U6.7 U6.15 U7.1 U7.7 U8.1 U8.7 U8.14 U8.15 U9.1 U9.7 U9.14 U10.1 U10.7 U10.15 | length 275.4
  Top Layer w0.254: C29.2@16.375,122.221 20.216,122.221 U10.1@20.224,122.213 ; C25.N@22.84,95.044 26.979,95.044 29.128,97.192 C26.2@29.128,98.984 ; v1(33.811,38.882) 35.332,40.402 D1.1@39.338,40.402 ; Q3.2@36.579,54.957 36.593,54.97 40.414,54.97 R3.1@40.428,54.984 v1(40.428,57.115) 46.705,57.115 47,56.821 D4.1@48.668,56.821 ; C19.2@40.002,122.282 40.009,122.289 U9.1@43.867,122.289 ; C27.N@46.662,95.088 51.252,95.088 52.874,96.71 C24.2@52.874,99.005 ; TPGND1.1@49.218,8.698 42,15.916 J1.2@42,18.65 47.65,18.65 49.251,20.251 49.251,20.278 R1.2@49.249,20.281 49.274,20.306 49.902,20.306 51.496,21.9 53.463,21.9 53.568,21.9 53.646,21.978 55.348,23.744 U1.7@55.333,24.546 ; J3.3@59.734,15.137 61.231,16.635 65.683,16.635 68.804,13.514 R10.1@68.929,13.514 68.949,13.534 v1(70.982,13.534) ; C1.2@61.116,28.237 61.124,28.246 62.478,28.246 63.081,28.849 C3.2@66.444,28.849 ; C28.2@63.756,121.869 67.44,121.869 U8.1@67.465,121.894 ; U3.1@69.53,20.264 U3.1@70.456,20.264 ; C11.N@70.071,94.957 74.951,94.957 76.475,96.481 C22.2@76.475,98.833 ; R11.1@74.381,13.554 74.361,13.534 v1(70.982,13.534) ; C8.1@77.724,27.61 77.724,23.695 77.049,23.02 C9.1@73.802,23.02 73.802,21.998 73.222,21.418 71.61,21.418 U3.1@70.456,20.264 ; C18.2@87.048,121.938 87.077,121.968 U7.1@90.936,121.968 ; C23.N@93.525,94.465 98.278,94.465 99.858,96.045 C16.2@99.858,98.326 ; C5.2@94.923,17 94.936,17.012 C5.2@94.936,17.024 ; C6.2@94.936,13.798 94.936,12.581 C6.2@94.948,12.569 96.921,14.542 U2.GND3@102.034,14.542 ; C4.2@94.948,21.431 94.936,21.419 C5.2@94.936,17.024 ; C6.2@95.013,13.733 94.948,13.798 94.948,17.012 C5.2@94.936,17.024 ; C20.2@111.133,121.085 114.459,121.085 U6.1@114.507,121.133 ; C15.N@117.121,94.057 121.589,94.057 123.344,95.812 C12.2@123.344,97.974 ; C21.2@134.73,121.23 138.359,121.23 U5.1@138.443,121.313 ; C17.N@141.153,94.387 145.644,94.387 147.41,96.153 C14.2@147.41,98.359 ; C30.2@158.657,121.218 161.77,121.218 U4.1@161.81,121.178 ; v1(161.069,30.452) 161.069,28.559 C32.2@161.085,28.544 ; C13.N@164.426,94.062 164.588,94.225 169.071,94.225 170.694,95.848 C10.2@170.694,98.013 ; C31.2@165.317,28.588 165.715,28.19 165.786,28.19 165.935,28.041 v1(165.935,24.658) 165.946,24.646 165.946,18.643 J12.2@165.958,18.631 ; v1(171.491,29.49) 172.82,28.161 C34.2@174.23,28.161 ; J13.2@180.352,18.581 180.352,27.524 C33.2@179.688,28.188 181.171,29.67 D3.1@183.802,29.67 183.802,33.852 C36.2@181.973,35.68 ; C35.2@181.993,40.981 182.668,41.656 J14.2@191.944,41.656 ; TPGND2.1@182.095,82.778 182.095,78.52 C37.2@182.131,78.484 182.872,79.226 J15.2@191.852,79.226 ; C38.2@182.122,73.233 188.769,66.586 J16.8@191.926,66.586 ; U3.1@70.456,20.264 71.794,20.264 71.973,20.085 71.973,18.386 U3.9@71.946,18.359 71.946,14.498 v1(70.982,13.534)
NetC1_1: C1.1 C2.1 Q1.9 Q2.9 U1.6 U1.10 U1.12 | length 18.3
  Top Layer w0.254: 52.553,24.421 52.573,24.401 v1(52.573,23.303) ; U1.10@55.333,26.044 57.123,26.044 57.957,26.877 C2.1@57.957,27.733 59.178,27.733 59.648,28.202 59.648,29.754 59.883,29.99 C1.1@61.116,29.99
  Bottom Layer w0.254: v1(52.573,23.303) 53.312,24.042 53.312,29.906 v1(54.317,30.911)
  other v2: 55.151,43.472 61.541,43.472 53.512,43.478 59.901,43.478 63.071,43.488 64.71,43.482 66.261,43.488 67.9,43.482 56.712,43.508 58.351,43.502 53.512,45.026 55.103,45.028 59.901,45.026 61.493,45.028 63.071,45.037 64.663,45.038 66.261,45.037 67.853,45.038 56.712,45.057 58.303,45.059
NetC2_2: C2.2 U1.11 | length 5.7
  Top Layer w0.254: U1.11@55.333,26.546 56.024,26.546 56.315,26.837 56.315,29.609 56.8,30.095 C2.2@57.957,30.095
NetC4_1: C4.1 C5.1 C6.1 L1.2 R5.2 TP5V.1 U2.VIN | length 0
NetC7_1: C7.1 U3.7 | length 5.6
  Top Layer w0.254: U3.7@74.362,18.994 76.107,18.994 77.951,17.15 78.929,17.15 C7.1@79.132,16.947
NetC7_2: C7.2 L1.1 U3.8 | length 3.2
  Top Layer w0.254: U3.8@74.52,20.335 U3.8@75.446,20.335 ; L1.1@81.712,14.147 81.712,15.684 L1.1@82.232,16.205